# Altium PCB PCB1.PcbDoc (part 2 of 3)
Units mil, origin at the board's own origin, x right, y up, seen from the top; angles counter-clockwise.
Board outline 2810.96 x 1006.14 mil, 4 copper layers (L1, L2, L3, L4), stack 61.583 mil thick; 58 components, 71 nets, 287 pads, 129 vias.
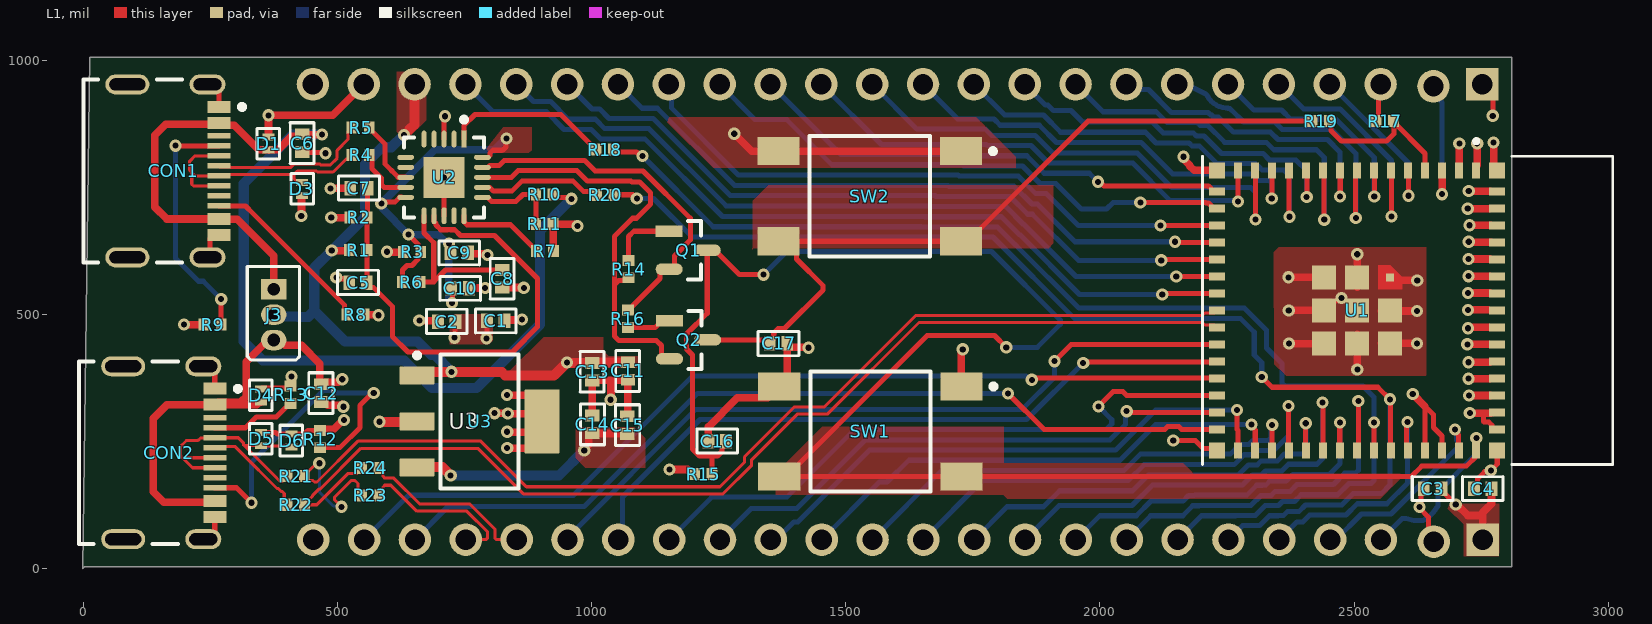
[diagram p0: L1 view]

## Part data (continued)
R8 R9 R12 R13: library part RC0402FR-135K1L, "Res Thick Film 0402 5.1K Ohm 1% 0.063W(1/16W) ±100ppm/C Pad SMD T/R", Case Code (Imperial)=0402, Case Code (Metric)=1005, LCSC Part Number=C4346772, Manufacturer="Yageo Group", Max Operating Temperature=155°C, Min Operating Temperature=-55°C, Power Dissipation=62.5mW, Supplier Part Number=13-RC0402FR-135K1LCT-ND, Temperature Coefficient=100ppm/°C, Tolerance=1%, Voltage Rating=50V, Case/Package=0402, Category="Chip SMD Resistors", China RoHS=Non-Compliant, ComponentLink1Description=https://datasheet.octopart.com:443/RC0402FR-135K1L-Yageo-datasheet-175887523.pdf?src-supplier=IHS, ComponentLink1URL=https://datasheet.octopart.com:443/RC0402FR-135K1L-Yageo-datasheet-175887523.pdf?src-supplier=IHS, ComponentLink2Description=https://datasheet.octopart.com:443/RC0402FR-135K1L-Yageo-datasheet-164759695.pdf?src-supplier=Future+Electronics, ComponentLink2URL=https://datasheet.octopart.com:443/RC0402FR-135K1L-Yageo-datasheet-164759695.pdf?src-supplier=Future+Electronics, ComponentLink3Description=https://datasheet.octopart.com/RC0402FR-135K1L-Yageo-datasheet-73766026.pdf, ComponentLink3URL=https://datasheet.octopart.com/RC0402FR-135K1L-Yageo-datasheet-73766026.pdf, ComponentLink4Description=https://datasheet.octopart.com:443/RC0402FR-135K1L-Yageo-datasheet-10408619.pdf?src-supplier=_legacy+Avnet, ComponentLink4URL=https://datasheet.octopart.com:443/RC0402FR-135K1L-Yageo-datasheet-10408619.pdf?src-supplier=_legacy+Avnet, ComponentLink5Description=http://sigma.octopart.com:80/rohs_statement/Yageo-company-2.pdf?src-supplier=Compliance+Statements, ComponentLink5URL=http://sigma.octopart.com:80/rohs_statement/Yageo-company-2.pdf?src-supplier=Compliance+Statements, ComponentLink6Description=http://sigma.octopart.com:80/conflict_mineral_statement/Yageo-company-3.pdf?src-supplier=Compliance+Statements, ComponentLink6URL=http://sigma.octopart.com:80/conflict_mineral_statement/Yageo-company-3.pdf?src-supplier=Compliance+Statements, Composition="Thick Film", Contact Plating=Tin, Height=350µm, Length=1mm, Lifecycle Status=Production, Manufacturer Part Number=RC0402FR-135K1L, Mounting Technology="Surface Mount", Number of Terminals=2, Packaging="Tape & Reel", Power Rating=62.5mW, Pricing="1=0.1, 10=0.005, 25=0.0044, 50=0.004, 100=0.0036, 250=0.00328 (USD)", Radiation Hardening=No, REACH SVHC=Yes, RoHS=Compliant, Stock=220857, Supplier=DigiKey, Termination=SMD/SMT, Width=500µm, Working Voltage=50V
R10: library part RC0402JR-0747KL, "Res Thick Film 1.0 x 0.5 mm 47K Ohm 5% 0.063W(1/16W) 100ppm/ C Molded SMD Paper T/R", Case Code (Imperial)=0402, LCSC Part Number=C105870, Manufacturer="Yageo Group", Max Operating Temperature=155°C, Max Power Dissipation=63mW, Min Operating Temperature=-55°C, Power Dissipation=62.5mW, Supplier Part Number=311-47KJRCT-ND, Temperature Coefficient=100ppm/°C, Tolerance=5%, Voltage Rating=50V, Case/Package=0402, Category="Chip SMD Resistors", China RoHS=Non-Compliant, ComponentLink1Description=https://datasheet.octopart.com:443/RC0402JR-0747KL-Yageo-datasheet-175887523.pdf?src-supplier=IHS, ComponentLink1URL=https://datasheet.octopart.com:443/RC0402JR-0747KL-Yageo-datasheet-175887523.pdf?src-supplier=IHS, ComponentLink2Description=https://datasheet.octopart.com:443/RC0402JR-0747KL-Yageo-datasheet-10408619.pdf?src-supplier=Newark, ComponentLink2URL=https://datasheet.octopart.com:443/RC0402JR-0747KL-Yageo-datasheet-10408619.pdf?src-supplier=Newark, ComponentLink3Description=https://datasheet.octopart.com:443/RC0402JR-0747KL-Yageo-datasheet-8324527.pdf?src-supplier=Newark, ComponentLink3URL=https://datasheet.octopart.com:443/RC0402JR-0747KL-Yageo-datasheet-8324527.pdf?src-supplier=Newark, ComponentLink4Description=https://datasheet.octopart.com:443/RC0402JR-0747KL-Yageo-datasheet-98239111.pdf?src-supplier=Upverter, ComponentLink4URL=https://datasheet.octopart.com:443/RC0402JR-0747KL-Yageo-datasheet-98239111.pdf?src-supplier=Upverter, ComponentLink5Description=https://datasheet.octopart.com:443/RC0402JR-0747KL-Yageo-datasheet-62067350.pdf?src-supplier=element14+APAC, ComponentLink5URL=https://datasheet.octopart.com:443/RC0402JR-0747KL-Yageo-datasheet-62067350.pdf?src-supplier=element14+APAC, ComponentLink6Description=https://datasheet.octopart.com:443/RC0402JR-0747KL-Yageo-datasheet-176638170.pdf?src-supplier=JRH+Electronics, ComponentLink6URL=https://datasheet.octopart.com:443/RC0402JR-0747KL-Yageo-datasheet-176638170.pdf?src-supplier=JRH+Electronics, ComponentLink7Description=https://datasheet.octopart.com:443/RC0402JR-0747KL-Yageo-datasheet-164759695.pdf?src-supplier=Future+Electronics, ComponentLink7URL=https://datasheet.octopart.com:443/RC0402JR-0747KL-Yageo-datasheet-164759695.pdf?src-supplier=Future+Electronics, ComponentLink8Description=https://datasheet.octopart.com:443/RC0402JR-0747KL-Yageo-datasheet-137700087.pdf?src-supplier=Future+Electronics, ComponentLink8URL=https://datasheet.octopart.com:443/RC0402JR-0747KL-Yageo-datasheet-137700087.pdf?src-supplier=Future+Electronics, ComponentLink9Description=https://datasheet.octopart.com:443/RC0402JR-0747KL-Yageo-datasheet-12531192.pdf?src-supplier=Future+Electronics, ComponentLink9URL=https://datasheet.octopart.com:443/RC0402JR-0747KL-Yageo-datasheet-12531192.pdf?src-supplier=Future+Electronics, ComponentLink10Description=https://datasheet.octopart.com:443/RC0402JR-0747KL-Yageo-datasheet-8324255.pdf?src-supplier=Future+Electronics, ComponentLink10URL=https://datasheet.octopart.com:443/RC0402JR-0747KL-Yageo-datasheet-8324255.pdf?src-supplier=Future+Electronics, ComponentLink11Description=https://datasheet.octopart.com:443/RC0402JR-0747KL-Yageo-datasheet-148775077.pdf?src-supplier=TME, ComponentLink11URL=https://datasheet.octopart.com:443/RC0402JR-0747KL-Yageo-datasheet-148775077.pdf?src-supplier=TME, ComponentLink12Description=https://datasheet.octopart.com/RC0402JR-0747KL-Yageo-datasheet-73766026.pdf, ComponentLink12URL=https://datasheet.octopart.com/RC0402JR-0747KL-Yageo-datasheet-73766026.pdf, ComponentLink13Description=https://datasheet.octopart.com:443/RC0402JR-0747KL-Yageo-datasheet-8329306.pdf?src-supplier=element14, ComponentLink13URL=https://datasheet.octopart.com:443/RC0402JR-0747KL-Yageo-datasheet-8329306.pdf?src-supplier=element14, ComponentLink14Description=http://sigma.octopart.com:80/conflict_mineral_statement/Yageo-company-3.pdf?src-supplier=Compliance+Statements, ComponentLink14URL=http://sigma.octopart.com:80/conflict_mineral_statement/Yageo-company-3.pdf?src-supplier=Compliance+Statements, ComponentLink15Description=http://sigma.octopart.com:80/rohs_statement/Yageo-company-2.pdf?src-supplier=Compliance+Statements, ComponentLink15URL=http://sigma.octopart.com:80/rohs_statement/Yageo-company-2.pdf?src-supplier=Compliance+Statements, Composition="Thick Film", Depth=500µm, Features="Moisture Resistant", Height=350µm, Lead Free="Lead Free", Length=1mm, Lifecycle Status=Production, Manufacturer Part Number=RC0402JR-0747KL, Military Standard=Not, Mounting Technology="Surface Mount", Number of Terminals=2, Number of Terminations=2, Packaging="Tape & Reel", Pins=2, Power Rating=63mW, Pricing="1=0.1, 10=0.006, 25=0.0044, 50=0.003, 100=0.0028 (USD)", REACH SVHC=Yes, RoHS=Compliant, Schedule B="8533210045, 8533210045|8533210045, 8533210045|8533210045|8533210045, 8533210045|8533210045|8533210045|8533210045", Stock=272761, Supplier=DigiKey, Termination=SMD/SMT, Voltage Rating (AC)=50V, Voltage Rating (DC)=50V, Width=500µm, Working Voltage=50V
SW1 SW2: library part TL3301NF160QG, "Switch Tactile N.O. SPST Round Button Gull Wing 0.05A 12VDC 100000Cycles 1.57N SMD T/R", Color=Black, Contact Current Rating=50mA, Contact Resistance=100mΩ, Insulation Resistance=100MΩ, LCSC Part Number=C273526, Manufacturer=E-Switch, Max Operating Temperature=70°C, Max Voltage Rating (DC)=12V, Min Operating Temperature=-40°C, Operating Force=1.57N, Supplier Part Number=612-TL3301N, Actuator Length=700µm, Category="Tactile Switches", ComponentLink1Description=https://datasheet.octopart.com:443/TL3301NF160QG-E-Switch-datasheet-182203450.pdf?src-supplier=IHS, ComponentLink1URL=https://datasheet.octopart.com:443/TL3301NF160QG-E-Switch-datasheet-182203450.pdf?src-supplier=IHS, ComponentLink2Description=https://datasheet.octopart.com:443/TL3301NF160QG-E-Switch-datasheet-500121.pdf?src-supplier=Farnell, ComponentLink2URL=https://datasheet.octopart.com:443/TL3301NF160QG-E-Switch-datasheet-500121.pdf?src-supplier=Farnell, ComponentLink3Description=https://datasheet.octopart.com:443/TL3301NF160QG-E-Switch-datasheet-100437263.pdf?src-supplier=Farnell, ComponentLink3URL=https://datasheet.octopart.com:443/TL3301NF160QG-E-Switch-datasheet-100437263.pdf?src-supplier=Farnell, ComponentLink4Description=https://datasheet.octopart.com:443/TL3301NF160QG-E-Switch-datasheet-140258799.pdf?src-supplier=Newark, ComponentLink4URL=https://datasheet.octopart.com:443/TL3301NF160QG-E-Switch-datasheet-140258799.pdf?src-supplier=Newark, ComponentLink5Description=https://datasheet.octopart.com:443/TL3301NF160QG-E-Switch-datasheet-32479546.pdf?src-supplier=Newark, ComponentLink5URL=https://datasheet.octopart.com:443/TL3301NF160QG-E-Switch-datasheet-32479546.pdf?src-supplier=Newark, ComponentLink6Description=https://datasheet.octopart.com:443/TL3301NF160QG-E-Switch-datasheet-155463344.pdf?src-supplier=Future+Electronics, ComponentLink6URL=https://datasheet.octopart.com:443/TL3301NF160QG-E-Switch-datasheet-155463344.pdf?src-supplier=Future+Electronics, ComponentLink7Description=https://datasheet.octopart.com:443/TL3301NF160QG-E-Switch-datasheet-26831017.pdf?src-supplier=Future+Electronics, ComponentLink7URL=https://datasheet.octopart.com:443/TL3301NF160QG-E-Switch-datasheet-26831017.pdf?src-supplier=Future+Electronics, ComponentLink8Description=https://datasheet.octopart.com:443/TL3301NF160QG-E-Switch-datasheet-574176.pdf?src-supplier=Future+Electronics, ComponentLink8URL=https://datasheet.octopart.com:443/TL3301NF160QG-E-Switch-datasheet-574176.pdf?src-supplier=Future+Electronics, ComponentLink9Description=https://datasheet.octopart.com:443/TL3301NF160QG-E-Switch-datasheet-27847350.pdf?src-supplier=Master+Electronics, ComponentLink9URL=https://datasheet.octopart.com:443/TL3301NF160QG-E-Switch-datasheet-27847350.pdf?src-supplier=Master+Electronics, ComponentLink10Description=https://datasheet.octopart.com:443/TL3301NF160QG/TR-E-Switch-datasheet-121581.pdf?src-supplier=DigiKey, ComponentLink10URL=https://datasheet.octopart.com:443/TL3301NF160QG/TR-E-Switch-datasheet-121581.pdf?src-supplier=DigiKey, Contact Material=Silver, Contact Plating=Silver, Current Rating=50mA, Electrical Life=100kcycles, Height=3.6mm, Housing Material=Nylon, Illumination Type=Illuminated, Lead Free="Lead Free", Length=6mm, Lifecycle Status=Production, Manufacturer Part Number=TL3301NF160QG, Max Current Rating=50mA, Mounting Technology="Surface Mount", Number of Positions=1, Pricing="1=0.23, 10=0.207, 25=0.202, 50=0.202, 100=0.182, 250=0.169, 500=0.15, 1000=0.15, 1200=0.141, 2400=0.137, 4800=0.128, 10000=0.128 (USD)", REACH SVHC=Yes, RoHS=Compliant, Stock=39289, Supplier=Mouser, Termination=Solder, Throw Configuration=SPST, Voltage Rating (DC)=12V, Width=6mm
U1: library part ESP32-S3-MINI-1-N8, "20.5dBm ESP32-S3FN8 Chip 2.4GHz SMD WiFi Modules ROHS", LCSC Part Number=C2913206, Manufacturer="Espressif Systems", Supplier Part Number=5407-ESP32-S3-MINI-1-N8CT-ND, Category="RF Transceiver Modules and Modems", ComponentLink1Description=https://datasheet.octopart.com:443/ESP32-S3-MINI-1-N8-Espressif-Systems-datasheet-188867343.pdf?src-supplier=TME, ComponentLink1URL=https://datasheet.octopart.com:443/ESP32-S3-MINI-1-N8-Espressif-Systems-datasheet-188867343.pdf?src-supplier=TME, ComponentLink2Description=https://datasheet.octopart.com:443/ESP32-S3-MINI-1-N8-Espressif-Systems-datasheet-165560562.pdf?src-supplier=TME, ComponentLink2URL=https://datasheet.octopart.com:443/ESP32-S3-MINI-1-N8-Espressif-Systems-datasheet-165560562.pdf?src-supplier=TME, ComponentLink3Description=https://datasheet.octopart.com:443/ESP32-S3-MINI-1-N8-Espressif-Systems-datasheet-165560559.pdf?src-supplier=TME, ComponentLink3URL=https://datasheet.octopart.com:443/ESP32-S3-MINI-1-N8-Espressif-Systems-datasheet-165560559.pdf?src-supplier=TME, Manufacturer Part Number=ESP32-S3-MINI-1-N8, Pricing="1=5.28, 10=4.566, 25=4.3196, 100=3.9802, 250=3.7768, 650=3.58103, 1300=3.44874, 1950=3.37497 (USD)", RoHS=Compliant, Stock=4462, Supplier=DigiKey
U2: library part FT231XQ-R, "Tape & Reel (TR) 2006 UART USB 2.0 interface controller 3.3V~5V 4mm 8mA 12Mbps", Ambient Temperature Range High=85°C, Case/Package=QFN, Clock Frequency=12.02MHz, LCSC Part Number=C1521552, Max Supply Current=8.4mA, Max Supply Voltage=5.5V, Min Operating Temperature=-40°C, Min Supply Voltage=2.97V, Operating Supply Current=8mA, Operating Supply Voltage=5V, Supplier Part Number=895-FT231XQ-R, Category="Interface ICs", ComponentLink1Description=https://datasheet.octopart.com:443/FT231XQ-R-FTDI-datasheet-182343132.pdf?src-supplier=IHS, ComponentLink1URL=https://datasheet.octopart.com:443/FT231XQ-R-FTDI-datasheet-182343132.pdf?src-supplier=IHS, ComponentLink2Description=https://datasheet.octopart.com:443/FT231XQ-R-FTDI-datasheet-11021087.pdf?src-supplier=ODG+(Origin+Data+Global), ComponentLink2URL=https://datasheet.octopart.com:443/FT231XQ-R-FTDI-datasheet-11021087.pdf?src-supplier=ODG+(Origin+Data+Global), ComponentLink3Description=https://datasheet.octopart.com:443/FT231XQ-R-FTDI-datasheet-28834672.pdf?src-supplier=SOS+electronic, ComponentLink3URL=https://datasheet.octopart.com:443/FT231XQ-R-FTDI-datasheet-28834672.pdf?src-supplier=SOS+electronic, ComponentLink4Description=https://datasheet.octopart.com:443/FT231XQ-R-FTDI-datasheet-68321328.pdf?src-supplier=TME, ComponentLink4URL=https://datasheet.octopart.com:443/FT231XQ-R-FTDI-datasheet-68321328.pdf?src-supplier=TME, ComponentLink5Description=https://datasheet.octopart.com:443/FT231XQ-R-FTDI-datasheet-134530624.pdf?src-supplier=SHENGYU+ELECTRONICS, ComponentLink5URL=https://datasheet.octopart.com:443/FT231XQ-R-FTDI-datasheet-134530624.pdf?src-supplier=SHENGYU+ELECTRONICS, Data Rate=12Mbps, Height=800µm, Height - Seated (Max)=800µm, Interface="UART, USB", Lead Free="Lead Free", Length=4mm, Lifecycle Status=Production, Manufacturer=FTDI, Manufacturer Part Number=FT231XQ-R, Max Operating Temperature=85°C, Mounting Technology="Surface Mount", Number of Channels=1, Number of Terminals=20, Pins=20, Pricing="1=2.34, 10=2.34, 25=2.26, 50=2.26, 100=2.17, 250=1.99, 500=1.82, 1000=1.77, 5000=1.72, 10000=1.72 (USD)", REACH SVHC=Yes, RoHS=Compliant, Stock=43377, Supplier=Mouser, Terminal Pitch=500µm, Weight=123.008581mg, Width=4mm
U3: library part TL1963A-33DCYR, "1.5-A, 20-V, low-dropout voltage regulator with reverse current & reverse voltage protection", Case/Package=SOT-223, Dropout Voltage=340mV, Input Bias Current=1mA, LCSC Part Number=C181262, Manufacturer="Texas Instruments", Manufacturer Lifecycle Status=ACTIVE, Max Operating Temperature=125°C, Max Output current=1.5A, Max Output Voltage=3.3V, Max Supply Voltage=20V, Min Current Limit=1.6A, Min Input Voltage=2.1V, Min Operating Temperature=-40°C, Supplier Part Number=296-24897-1-ND, Accuracy=3%, Category="LDO Voltage Regulators", ComponentLink1Description=https://datasheet.octopart.com:443/TL1963A-33DCYR-Texas-Instruments-datasheet-36835243.pdf?src-supplier=Texas+Instruments, ComponentLink1URL=https://datasheet.octopart.com:443/TL1963A-33DCYR-Texas-Instruments-datasheet-36835243.pdf?src-supplier=Texas+Instruments, ComponentLink2Description=https://octopart.com:443/opatz8j6/c1?t=ue34aQf-Pf0weOUYV3eko1qZLLyE48fCV2-zg-TsNp1rsW1B6nlw9cjsqo2zREwEOqR3yka64AKjT1Qb6_GEktXrjT4KyRi_Lw8AXAO-f-qsC5IWw0K-58XDkHHT1lD142LOET-jwQiEsvFSFdN-PjTe1QsFcl-DgR7qoUeMNIFOdMsEc8DDtW9TQMuxEhLdy5D8O7bg3FKTHwcTkEHTeeZL-BGRD4V2gVj7q1Iqk_g4gGpnxCaabYdKBfitTQOm0-y87aJLE51BAYhVoagzuuw_l99eEa8gAuXS1dSBeL5ckbDn8ncHHEQVlCFJcOlrNP71Dr9JbHrQ7dY_LkHNG9mkboBuZKfdRdTVQD5rN7SdhYFFdEvycEesiEo-3kvY3MYHmk0&src-supplier=Texas+Instruments, ComponentLink2URL=https://octopart.com:443/opatz8j6/c1?t=ue34aQf-Pf0weOUYV3eko1qZLLyE48fCV2-zg-TsNp1rsW1B6nlw9cjsqo2zREwEOqR3yka64AKjT1Qb6_GEktXrjT4KyRi_Lw8AXAO-f-qsC5IWw0K-58XDkHHT1lD142LOET-jwQiEsvFSFdN-PjTe1QsFcl-DgR7qoUeMNIFOdMsEc8DDtW9TQMuxEhLdy5D8O7bg3FKTHwcTkEHTeeZL-BGRD4V2gVj7q1Iqk_g4gGpnxCaabYdKBfitTQOm0-y87aJLE51BAYhVoagzuuw_l99eEa8gAuXS1dSBeL5ckbDn8ncHHEQVlCFJcOlrNP71Dr9JbHrQ7dY_LkHNG9mkboBuZKfdRdTVQD5rN7SdhYFFdEvycEesiEo-3kvY3MYHmk0&src-supplier=Texas+Instruments, ComponentLink3Description=https://datasheet.octopart.com:443/TL1963A-33DCYR-Texas-Instruments-datasheet-10255270.pdf?src-supplier=Texas+Instruments, ComponentLink3URL=https://datasheet.octopart.com:443/TL1963A-33DCYR-Texas-Instruments-datasheet-10255270.pdf?src-supplier=Texas+Instruments, ComponentLink4Description=https://sigma.octopart.com:443/49253063/technical_drawing/Texas-Instruments-TL1963A-33DCYR.pdf?src-supplier=Texas+Instruments, ComponentLink4URL=https://sigma.octopart.com:443/49253063/technical_drawing/Texas-Instruments-TL1963A-33DCYR.pdf?src-supplier=Texas+Instruments, ComponentLink5Description=https://datasheet.octopart.com:443/TL1963A-33DCYR-Texas-Instruments-datasheet-159117591.pdf?src-supplier=Augswan, ComponentLink5URL=https://datasheet.octopart.com:443/TL1963A-33DCYR-Texas-Instruments-datasheet-159117591.pdf?src-supplier=Augswan, ComponentLink6Description=https://datasheet.octopart.com:443/TL1963A-33DCYR-Texas-Instruments-datasheet-21820479.pdf?src-supplier=Newark, ComponentLink6URL=https://datasheet.octopart.com:443/TL1963A-33DCYR-Texas-Instruments-datasheet-21820479.pdf?src-supplier=Newark, ComponentLink7Description=https://datasheet.octopart.com:443/TL1963A-33DCYR-Texas-Instruments-datasheet-16079880.pdf?src-supplier=Farnell, ComponentLink7URL=https://datasheet.octopart.com:443/TL1963A-33DCYR-Texas-Instruments-datasheet-16079880.pdf?src-supplier=Farnell, ComponentLink8Description=https://datasheet.octopart.com:443/TL1963A-33DCYR-Texas-Instruments-datasheet-14171511.pdf?src-supplier=iiiC, ComponentLink8URL=https://datasheet.octopart.com:443/TL1963A-33DCYR-Texas-Instruments-datasheet-14171511.pdf?src-supplier=iiiC, ComponentLink9Description=http://sigma.octopart.com:80/conflict_mineral_statement/Texas-Instruments-company-63.pdf?src-supplier=Compliance+Statements, ComponentLink9URL=http://sigma.octopart.com:80/conflict_mineral_statement/Texas-Instruments-company-63.pdf?src-supplier=Compliance+Statements, ComponentLink10Description=http://sigma.octopart.com:80/reach_statement/Texas-Instruments-company-64.pdf?src-supplier=Compliance+Statements, ComponentLink10URL=http://sigma.octopart.com:80/reach_statement/Texas-Instruments-company-64.pdf?src-supplier=Compliance+Statements, Contact Plating=Tin, Height=1.8mm, Lead Free="Lead Free", Length=6.5mm, Lifecycle Status=Production, Manufacturer Part Number=TL1963A-33DCYR, Min Output Voltage=3.3V, Nominal Output Voltage=3.3V, Number of Outputs=1, Number of Regulators=1, Output Current=1.5A, Output Type=Fixed, Output Voltage=3.3V, Pins=4, Polarity=Positive, Pricing="1=3.13, 10=2.344, 25=2.1476, 100=1.9323, 250=1.82956, 500=1.76766, 1000=1.71669 (USD)", Quiescent Current=1mA, Radiation Hardening=No, REACH SVHC=No, RoHS=Compliant, Schedule B="8542390000, 8542390000|8542390000|8542390000|8542390000|8542390000", Stock=5365, Supplier=DigiKey, Thickness=1.6mm, Width=3.5mm

## Via types
v1: diameter 24, hole 12, L1 to L4, tented both sides, 129 vias

## Nets (pads, with @x,y where several pads share a name; then routed paths per layer and width w, separated by ;. In a path a pad name is that pad's centre, name@x,y a point inside that pad or via, vN(x,y) a via of type N, cw(c..) or ccw(c..) an arc to the next point about the centre after c; other vN are vias at no path point)
+3V3: C1.1 C2.1 C3.1 C4.1 J1.2 J2.1 R2.2 R3.2 R15.3 U1.3 | length 3912.6
  L1 w10: v1@731.31,455.42 C2.1@731.31,493.02 ; v1@794.43,454.13 C1.1@794.43,491.73 ; R15.3@1200.54,183.94 R15.3@1202.94,186.34 ; C3.1@2671.66,157.46 2671.66,154.89 2699.84,126.7 v1(2699.84,126.59) ; v1(2672.9,736.99) v1@2673.24,737.33 ; 2745.85,105.08 2751.67,110.9 2752.83,110.9 ; C4.1@2770.22,157.27 C4.1@2770.41,157.46
  L1 w15: v1@488.9,690.75 R2.2@526.49,690.75 ; v1@598.33,623.01 R3.2@630.08,623.01 ; v1(1153.27,195.4) 1189.08,195.4 1193.82,190.65 1199.81,190.65 1200.54,189.92 R15.3@1200.54,183.94 ; v1@2673.24,737.33 U1.3@2673.24,784.03 ; v1(2699.84,126.59) 2702.28,126.59 2723.79,105.08 2745.85,105.08 ; J2.1@2752.83,57.49 2752.83,105.08 2752.83,110.9 2770.22,128.29 C4.1@2770.22,157.27
  L2 w25: v1(488.24,691.4) 529.94,691.4 v1(597.68,623.66) 691.26,530.07 691.26,508.94 730.66,469.54 v1(730.66,454.77) 792.49,454.77 v1(793.77,453.48) 774.96,434.67 774.96,199.16 792.22,181.91 1139.78,181.91 v1(1153.27,195.4) ; 2651.06,175.49 2659.18,167.37
  L2 w30: 2679.69,146.86 2699.84,126.7 v1(2699.84,126.59)
  L2 w35: v1(1153.27,195.4) 1173.18,175.49 2651.06,175.49 ; v1(2672.9,736.99) 2672.9,436.86 2659.18,423.14 2659.18,167.37 2679.69,146.86
  L4 w10: J1.2@2656.11,949.11 2656.11,934.5 2672.94,917.67 2672.94,737.03 v1(2672.9,736.99)
+3V3_FTDI: C9.1 C10.1 R3.3 R6.2 U2.10 U2.20 | length 891.8
  L1 w10: v1(586.65,718.62) 589.33,721.3 613.12,721.3 622.84,731.03 U2.10@626.18,731.03 ; R6.2@628.43,563.94 628.43,587.98 637.25,596.81 646.89,596.81 658.47,608.39 658.47,616.85 R3.3@664.45,622.83 ; v1@639.97,657.43 658.47,638.93 658.47,629.23 R3.3@664.04,623.66 ; v1(719.56,640.23) 721.13,638.65 721.13,625.29 C9.1@725.26,621.17 ; C10.1@723.54,553.15 C10.1@724.37,552.32 ; v1@726.42,523.88 C10.1@726.42,561.48 ; U2.20@785.41,809.37 796.72,809.37 800.06,812.71 800.06,817.45 805.92,823.31 823.26,823.31 823.66,823.71 825.82,823.71 831.68,829.57 831.68,845.02 v1(833.05,846.39)
  L4 w10: v1@715.86,640.23 v1(719.56,640.23)
  L4 w15: v1@715.86,640.23 698.62,657.47 v1(639.97,657.47) 588.37,709.06 588.37,716.9 v1(586.65,718.62) 692.15,824.12 788.14,824.12 788.7,824.67 808.9,824.67 830.61,846.39 v1(833.05,846.39) ; v1(719.56,640.23) 719.56,531.87 725.76,525.67 v1(725.76,523.23)
+3V3_REG: C14.1 C15.1 U3.3 | length 438.8
  L1 w10: C15.1@1069.87,266.21 C15.1@1070.56,265.52
  L1 w15: v1(985.75,233) 985.75,235.44 994.93,244.62 994.93,262.8 999.03,266.9 C14.1@1001.6,266.9 ; C14.1@1002.29,266.21 C15.1@1069.87,266.21
  L1 w20: U3.3@684.86,200.2 706.42,200.2 v1(723.11,183.5)
  L4 w20: v1(723.11,183.5) 936.25,183.5 v1(985.75,233)
+5V: C11.1 C13.1 J1.22 J3.2 R1.2 U3.1 | length 1349.3
  L1 w10: v1(631.22,853.19) 642.58,864.54 ; J1.22@652.11,930.9 J1.22@652.73,931.52 ; U3.1@686.48,381.27 692.76,387.54 ; C11.1@1071.01,405.73 C11.1@1071.84,406.56
  L1 w15: v1@489.72,625.65 R1.2@527.32,625.65 ; 823.42,387.54 830.34,380.61
  L1 w20: 642.58,864.54 652.11,874.08 J1.22@652.11,930.9 ; 692.76,387.54 v1(724.73,387.54) 823.42,387.54 ; 830.34,380.61 926.59,380.61 v1(951.64,405.66) ; v1@952.29,405.01 C13.1@989.89,405.01 ; C13.1@1002.43,405.73 C11.1@1071.01,405.73
  L4 w20: J3.2@375,500 378.83,496.17 422.69,496.17 423.14,495.72 443.14,495.72 454.86,507.44 ; 606.17,829.25 588.06,829.25 554.65,795.84 554.65,691.87 v1(489.07,626.3) 454.86,592.08 454.86,507.44 ; 606.2,829.25 630.14,853.19 v1(631.22,853.19) ; v1(724.73,387.54) 691.43,420.85 684.5,420.85 658.44,446.91 515.39,446.91 454.86,507.44
+5V_VBUS1: C6.1 CON1.A4B9 CON1.B4A9 D1.B10 J3.1 R10.3 | length 2338
  L1 w10: R10.3@928.2,736.1 928.2,732.51 930.18,730.53 957.93,730.53 v1(960.61,727.85)
  L1 w15: D1.B10@365.07,823.53 364.46,824.14 345.81,824.14 297.04,872.91 271.71,872.91 CON1.A4B9@267.4,877.22 265.02,874.84 162.88,874.84 141.18,853.14 141.18,711.77 164.7,688.24 CON1.B4A9@267.4,688.24 268.11,687.53 302.96,687.53 375,615.49 J3.1@375,550 ; D1.B10@366.99,824.73 384.13,824.73 410.02,850.61 427.2,850.61 C6.1@431.3,854.71 ; C6.1@432.41,854.22 v1(469.76,854.22)
  L4 w20: v1(469.76,854.22) 412.33,854.22 335,776.9 316.18,758.08 316.18,640.53 316.18,447.25 353.43,410 631.82,410 686.28,355.54 773.5,355.54 898.98,481.03 898.98,666.23 v1(960.61,727.85)
+5V_VBUS2: C12.1 CON2.A4B9 CON2.B4A9 D4.B10 J3.3 | length 897.4
  L1 w10: CON2.B4A9@256.34,131.17 CON2.B4A9@259.11,133.94 ; CON2.A4B9@259.11,322.92 265.92,329.73 282.12,329.73 282.6,330.21 308.47,330.21 ; C12.1@465.78,363.03 C12.1@468.35,363.03
  L1 w15: CON2.B4A9@256.34,131.17 158.64,131.17 137.98,151.83 137.98,295.76 165.14,322.92 CON2.A4B9@259.11,322.92 264.51,322.92 266.4,322.92 308.47,322.92 326.65,322.92 341.12,322.92 346.53,328.32 D4.B10@350.23,328.32 ; 312,330.21 320.79,339 320.79,407.34 363.44,450 386.76,450 397.18,439.59 429.68,439.59 465.78,403.48 C12.1@465.78,363.03 ; C12.1@473.67,366.57 474.23,367.13 501.64,367.13 507.42,372.9 v1(509.85,372.9)
+VCC_FTDI: C5.1 C7.1 R1.3 R2.3 U2.12 | length 994.2
  L1 w10: C7.1@559.93,748.78 559.65,748.49 559.65,691.95 R2.3@558.82,691.12 558.51,690.81 558.51,627.25 R1.3@558.2,626.94 558.15,626.89 C5.1@558.1,562.96 C5.1@558.1,562.96 558.1,560.39 564.7,553.79 570.84,553.79 608.29,516.34 608.29,457.13 638.94,426.48 844.44,426.48 893.98,476.03 893.98,571.22 809.42,655.78 742.19,655.78 730.91,667.06 723.15,667.06 722.98,667.23 716.7,667.23 716.53,667.06 703.47,667.06 694.23,676.3 694.23,679.37 690.31,683.28 U2.12@690.31,694.59
BTN_GPIO0: C17.1 Q2.3 R19.2 SW2.3 SW2.4 | length 1567.5
  L1 w10: Q2.3@1228.45,450.46 1344,450.46 1350.6,443.87 C17.1@1350.6,443.62 1357.2,450.22 1357.2,457.29 1358.57,458.66 1358.57,464.01 1367.36,472.8 1379.77,472.8 1455.63,548.65 1455.63,556.94 1403.24,609.32 1403.24,621.82 1380.68,644.38 SW2.4@1368.19,644.38 SW2.3@1726.46,644.38 1740.23,644.38 1976.5,880.64 R19.2@2417.62,880.64
CHIP_PU: C16.1 J2.3 Q1.3 R15.2 SW1.3 SW1.4 U1.45 | length 3751.7
  L1 w10: R15.2@1236.95,184.86 1236.95,221.95 ; C16.1@1264.53,251.12 1257.93,244.52 1257.93,237.46 1256.56,236.09 1256.56,230.73 1247.78,221.95 1236.95,221.95 ; v1(1338.4,578.65) 1291.16,578.65 1243.09,626.72 Q1.3@1227.64,626.72 1227.64,502.71 1186.73,461.81 1186.73,432.52 1198.5,420.76 1198.5,235.6 1212.15,221.95 1236.95,221.95 ; SW1.4@1369.37,181.66 SW1.4@1383.15,181.66 ; v1(1815.79,435.72) 1792.65,458.86 1660.35,458.86 SW1.4@1383.15,181.66 ; v1(2740.4,257.21) 2740.28,257.09 2740.28,224.33 2741.65,222.96 2720.79,202.1 2632.8,202.1 2612.36,181.66 SW1.3@1727.63,181.66 SW1.4@1383.15,181.66
  L4 w10: v1(1338.4,578.65) 1384.14,624.39 1786.88,624.39 1922.01,489.25 1922.01,480.97 1876.77,435.72 v1(1815.79,435.72) ; J2.3@2552.83,57.49 2591.2,95.87 2594.13,98.8 2602.42,98.8 2617.59,94.97 2634.72,94.97 cw(c2656.83,53.49) 2643.57,98.59 2655.77,110.79 2665.3,124.31 2665.3,151.32 2740.4,226.42 v1(2740.4,257.21)
CON1_USB_N: CON1.A7 CON1.B6 CON1.B7 D3.B10 R4.2 | length 528.8
  L1 w6.03: 214.04,779.78 220.93,772.89 CON1.A7@267.4,772.89 269.79,775.28 290.12,775.28 290.55,775.72 414.41,775.72 ; CON1.B6@267.4,753.2 217.39,753.2 213.86,756.74 213.86,779.6 209.26,784.2 209.26,792.64 209.61,792.99 209.61,801.78 220.09,812.26 CON1.B7@267.4,812.26 ; D3.B10@430.38,760.19 426.5,764.06 418.11,764.06 414.41,767.76 414.41,775.72 ; R4.2@528.89,814.43 528.89,813.25 521.28,805.63 517.25,805.63 492.05,780.43 461.36,780.43 459.06,782.73 421.42,782.73 414.41,775.72
CON1_USB_P: CON1.A6 R5.2 | length 314.8
  L1 w6.03: CON1.A6@267.4,792.57 269.79,790.18 290.12,790.18 290.55,789.75 408.6,789.75 415.61,796.76 464.87,796.76 467.17,794.46 486.23,794.46 499.72,807.95 499.72,823.27 521.28,844.83 521.28,860.12 R5.2@528.89,867.74
CON2_USB_N: CON2.A7 CON2.B6 CON2.B7 D5.B10 D6.B10 R21.2 | length 517.6
  L1 w6.03: CON2.B6@259.11,198.9 215.17,198.9 195.48,218.58 ; CON2.A7@259.11,218.58 195.48,218.58 ; 317.35,242.95 D5.B10@350.45,242.95 352.1,241.3 408.81,241.3 D6.B10@410.45,239.66 ; R21.2@403.39,186.29 395.77,178.67 395.77,175.74 392.24,172.2 387.24,172.2 316.93,242.52 315.37,244.08 315.37,248.08 305.49,257.95 241.88,257.95 241.25,257.32 230.97,257.32 226.33,252.69 203.7,252.69 200.48,249.48 191.95,240.94 191.95,222.12 195.48,218.58
CON2_USB_P: CON2.A6 R22.2 | length 196.2
  L1 w6.03: CON2.A6@259.11,238.27 261.5,240.66 281.83,240.66 282.26,241.1 298.51,241.1 308.47,231.14 311.12,228.49 381.43,158.17 384,158.17 390.27,151.91 392.24,151.91 395.77,148.37 395.77,136.56 R22.2@401.54,130.79
CON_ESP_USB_N: J2.21 R23.2 | length 321
  L1 w6.03: R23.2@582.28,144.47 589.9,152.09 589.9,160.94 593.43,164.47 605.5,164.47 656.42,113.55 754.82,113.55 795.81,72.56 795.81,61.03 792.28,57.49 J2.21@752.83,57.49
CON_ESP_USB_P: J2.20 R24.2 | length 344.3
  L1 w6.03: R24.2@582.28,198.5 589.9,190.88 589.9,182.03 593.43,178.5 611.32,178.5 662.23,127.58 760.63,127.58 809.84,78.37 809.84,61.03 813.38,57.49 J2.20@852.83,57.49